# EAGLE board shiva.old (EAGLE 7.7.0)
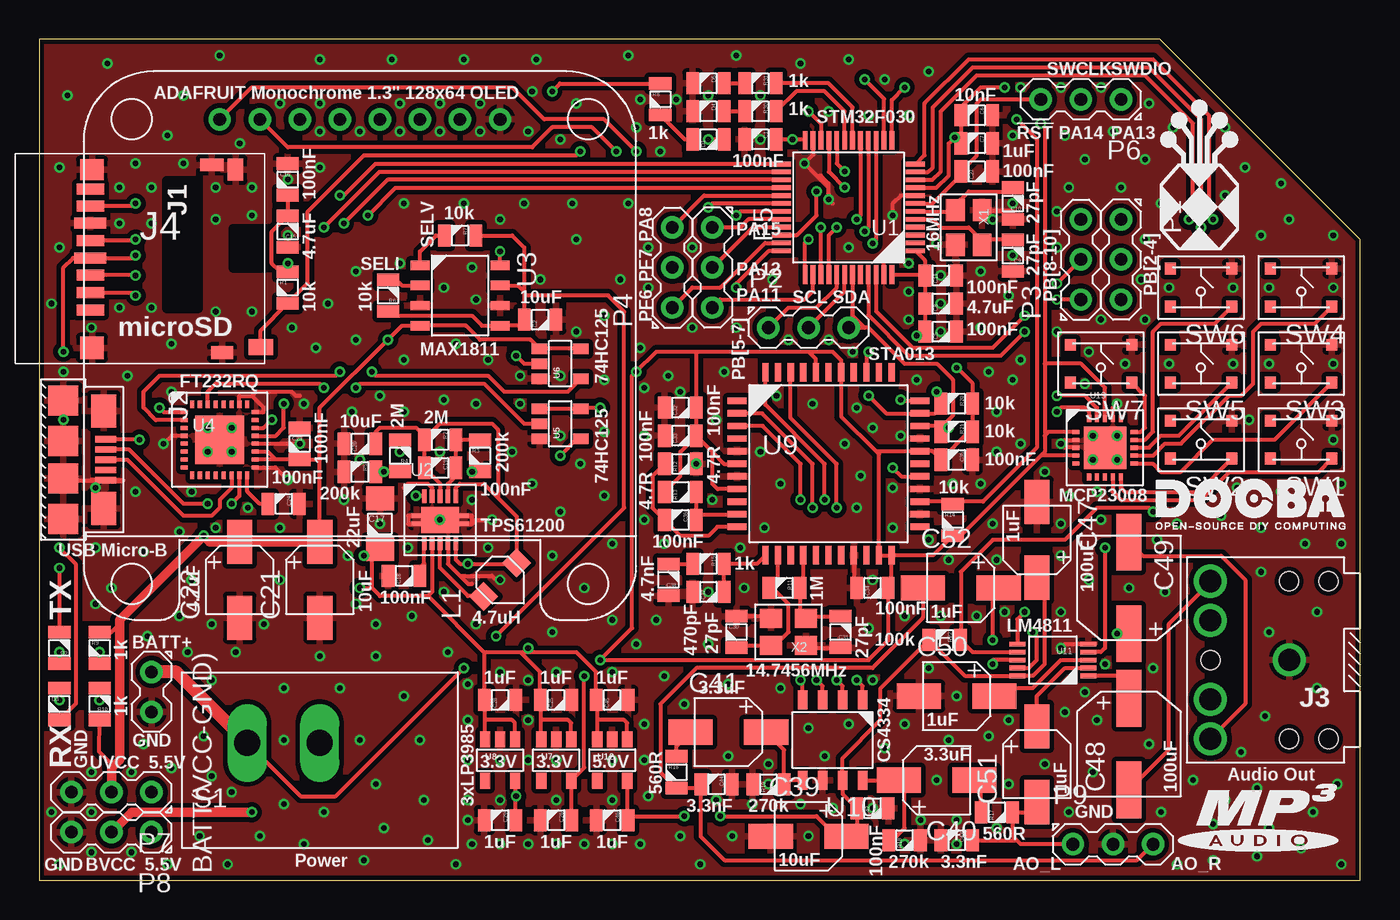
[diagram p0: board, top side]
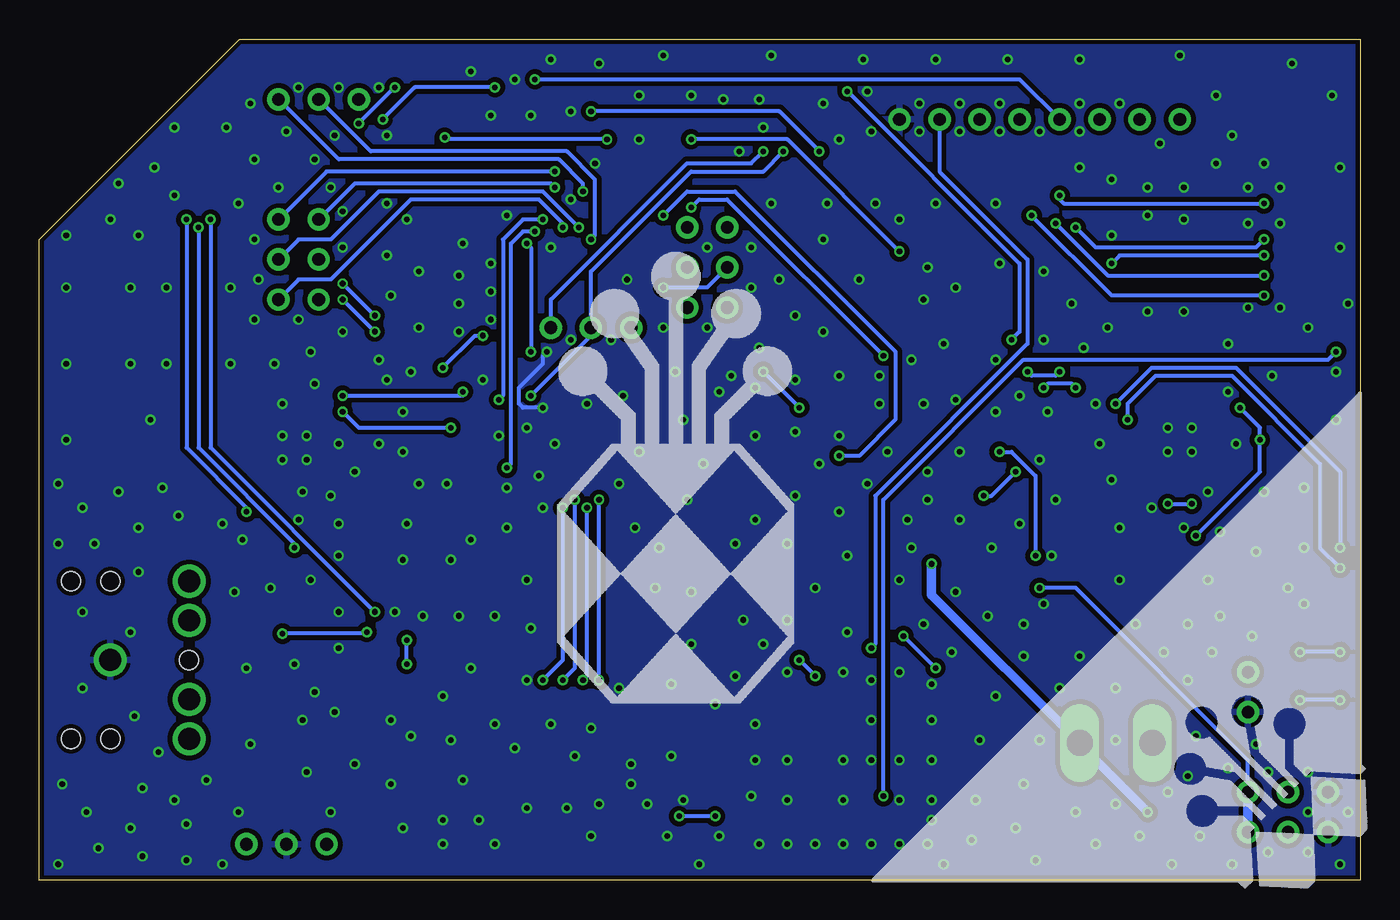
[diagram p1: board, bottom side, seen from below]

Size 83.74 x 53.33 mm. Coordinates in mm from the lower left corner, seen from the top.
Outline: 0,0 83.74,0 83.74,40.63 71.05,53.33 0,53.33 0,0
Copper layers (1*16): Top 0.035mm / dielectric 1.5mm / Bottom 0.035mm
Design rules "dooba *": minimum track width 6mil, minimum drill 12mil, track to track 6mil, track to pad 6mil, pad to pad 6mil, via to via 6mil, smd to smd 0mil, copper to edge 10mil, drill to drill 10mil, minimum pad ring 10mil, minimum via ring 6mil, stop-mask expansion 2mil, vias tented up to drill 25mil, thermal gap 10mil

## Footprints (pad centres in the part's own frame; a part is rotated, then mirrored left to right if it is on the bottom)
PIN_2 = drill 0.8 pad 1.422: 1 -1.27,0; 2 1.27,0
0805 = smd 0.8 x 1.4: 1 -1,0; 2 1,0
1206 = smd 1.524 x 1.778: 1 -1.6,0; 2 1.6,0
RADCAP_SMD_43 = smd 2.8 x 1.6: 1 -2.4,0; 2 2.4,0
RADCAP_SMD_66 = smd 3.6 x 1.6: 1 -2.9,0; 2 2.9,0
DM3D-SF = smd 0.7 x 1.75: CLK/SCK -1.2,-1.34; CMD/DI 1,-1.34; DAT0/DO -3.4,-1.34; DAT1 -4.45,-1.34; DAT2 3.2,-1.34; DAT3/CS 2.1,-1.34 | smd 0.8 x 1.5: GND1 -6,6.36 | smd 0.8 x 1.4: GND2 5.9,7.01 | smd 1.4 x 1.5: GND3 5.6,-1.24 | smd 1.3 x 1.5: GND4 -5.7,-1.24 | smd 1 x 1.55: SW_A 5.55,9.46 | smd 1.4 x 1: SW_B -5.7,7.86 | smd 0.7 x 2.032: VDD -0.1,-1.34; VSS -2.3,-1.34
AMPHENOL-USB-MICRO-B = smd 0.4 x 1.35: 1 -1.3,2.675; 2 -0.65,2.675; 3 0,2.675; 4 0.65,2.675; 5 1.3,2.675 | smd 1.9 x 1.9: P$6 -1.2,0; P$7 1.2,0; P$8 -3.75,0; P$9 3.75,0 | smd 2.1 x 1.6: P$10 -3.1,2.55; P$11 3.1,2.55
SJ1-352XN = drill 1.4 pad 2: 1 0,0; 2 5,-5; 3 5,5; 4 5,-2.5; 5 5,2.5 | hole 1.2: 5,0; 0,-5; 0,5; -2.5,5; -2.5,-5
ADAFRUIT_OLED_13 = drill 0.8 pad 1.422: 3V3 3.81,0; CLK -6.35,0; CS 1.27,0; DATA -8.89,0; DC -3.81,0; GND 8.89,0; RST -1.27,0; VIN 6.35,0
IND-SMD-3232 = smd 1.3 x 1.3 rotated 315: 1 -1.061,1.061; 2 1.061,-1.061
PIN_3 = drill 0.8 pad 1.422: 1 -2.54,0; 2 0,0; 3 2.54,0
GF-1123-0025 = drill 1.65 long: 1 -4.6,1.09; 2 0,1.09
TACTSW_CK_PTS_830 = smd 0.7 x 0.75: 1 -1.95,1.2; 2 1.95,1.2; 3 -1.95,-1.2; 4 1.95,-1.2
QFP48 = smd 1.2 x 0.3: 1 -4.25,2.75; 2 -4.25,2.25; 3 -4.25,1.75; 4 -4.25,1.25; 5 -4.25,0.75; 6 -4.25,0.25; 7 -4.25,-0.25; 8 -4.25,-0.75; 9 -4.25,-1.25; 10 -4.25,-1.75; 11 -4.25,-2.25; 12 -4.25,-2.75; 25 4.25,-2.75; 26 4.25,-2.25; 27 4.25,-1.75; 28 4.25,-1.25; 29 4.25,-0.75; 30 4.25,-0.25; 31 4.25,0.25; 32 4.25,0.75; 33 4.25,1.25; 34 4.25,1.75; 35 4.25,2.25; 36 4.25,2.75 | smd 0.3 x 1.2: 13 -2.75,-4.25; 14 -2.25,-4.25; 15 -1.75,-4.25; 16 -1.25,-4.25; 17 -0.75,-4.25; 18 -0.25,-4.25; 19 0.25,-4.25; 20 0.75,-4.25; 21 1.25,-4.25; 22 1.75,-4.25; 23 2.25,-4.25; 24 2.75,-4.25; 37 2.75,4.25; 38 2.25,4.25; 39 1.75,4.25; 40 1.25,4.25; 41 0.75,4.25; 42 0.25,4.25; 43 -0.25,4.25; 44 -0.75,4.25; 45 -1.25,4.25; 46 -1.75,4.25; 47 -2.25,4.25; 48 -2.75,4.25
S-PVSON-N10 = smd 0.3 x 0.85: 1 -1,-1.5; 2 -0.5,-1.5; 3 0,-1.5; 4 0.5,-1.5; 5 1,-1.5; 6 1,1.5; 7 0.5,1.5; 8 0,1.5; 9 -0.5,1.5; 10 -1,1.5 | smd 2.4 x 1.65: PAD 0,0 | smd 0.6 x 0.28: PAD0 -1.499,0.25; PAD1 -1.499,-0.25; PAD2 1.499,0.25; PAD3 1.499,-0.25
SO8 = smd 0.6 x 1.2: P$1 -1.905,-2.54; P$2 -0.635,-2.54; P$3 0.635,-2.54; P$4 1.905,-2.54; P$5 1.905,2.54; P$6 0.635,2.54; P$7 -0.635,2.54; P$8 -1.905,2.54
32-VQFN = smd 0.45 x 0.26: P$1 -2.25,1.75; P$2 -2.25,1.25; P$3 -2.25,0.75; P$4 -2.25,0.25; P$5 -2.25,-0.25; P$6 -2.25,-0.75; P$7 -2.25,-1.25; P$8 -2.25,-1.75; P$17 2.25,-1.75; P$18 2.25,-1.25; P$19 2.25,-0.75; P$20 2.25,-0.25; P$21 2.25,0.25; P$22 2.25,0.75; P$23 2.25,1.25; P$24 2.25,1.75 | smd 0.26 x 0.45: P$9 -1.75,-2.25; P$10 -1.25,-2.25; P$11 -0.75,-2.25; P$12 -0.25,-2.25; P$13 0.25,-2.25; P$14 0.75,-2.25; P$15 1.25,-2.25; P$16 1.75,-2.25; P$25 1.75,2.25; P$26 1.25,2.25; P$27 0.75,2.25; P$28 0.25,2.25; P$29 -0.25,2.25; P$30 -0.75,2.25; P$31 -1.25,2.25; P$32 -1.75,2.25 | smd 3.1 x 3.1: P$33 0,0
SOT23-5 = smd 0.66 x 1: 1 0.95,1.315; 2 0,1.315; 3 -0.95,1.315; 4 -0.95,-1.315; 5 0.95,-1.315
QFP44 = smd 1.2 x 0.4: 1 -5.8,4; 2 -5.8,3.2; 3 -5.8,2.4; 4 -5.8,1.6; 5 -5.8,0.8; 6 -5.8,0; 7 -5.8,-0.8; 8 -5.8,-1.6; 9 -5.8,-2.4; 10 -5.8,-3.2; 11 -5.8,-4; 23 5.8,-4; 24 5.8,-3.2; 25 5.8,-2.4; 26 5.8,-1.6; 27 5.8,-0.8; 28 5.8,0; 29 5.8,0.8; 30 5.8,1.6; 31 5.8,2.4; 32 5.8,3.2; 33 5.8,4 | smd 0.4 x 1.2: 12 -4,-5.8; 13 -3.2,-5.8; 14 -2.4,-5.8; 15 -1.6,-5.8; 16 -0.8,-5.8; 17 0,-5.8; 18 0.8,-5.8; 19 1.6,-5.8; 20 2.4,-5.8; 21 3.2,-5.8; 22 4,-5.8; 34 4,5.8; 35 3.2,5.8; 36 2.4,5.8; 37 1.6,5.8; 38 0.8,5.8; 39 0,5.8; 40 -0.8,5.8; 41 -1.6,5.8; 42 -2.4,5.8; 43 -3.2,5.8; 44 -4,5.8
PDSO-10 = smd 1 x 0.3: 1 -2.25,1; 2 -2.25,0.5; 3 -2.25,0; 4 -2.25,-0.5; 5 -2.25,-1; 6 2.25,-1; 7 2.25,-0.5; 8 2.25,0; 9 2.25,0.5; 10 2.25,1
20-VQFN = smd 0.45 x 0.26: 1 -1.85,1; 2 -1.85,0.5; 3 -1.85,0; 4 -1.85,-0.5; 5 -1.85,-1; 11 1.85,-1; 12 1.85,-0.5; 13 1.85,0; 14 1.85,0.5; 15 1.85,1 | smd 0.26 x 0.45: 6 -1,-1.85; 7 -0.5,-1.85; 8 0,-1.85; 9 0.5,-1.85; 10 1,-1.85; 16 1,1.85; 17 0.5,1.85; 18 0,1.85; 19 -0.5,1.85; 20 -1,1.85 | smd 2.7 x 2.7: PAD 0,0
XTAL_3225 = smd 1.4 x 1.2: 1 -1.1,-0.85; 2 1.1,-0.85; 3 1.1,0.85; 4 -1.1,0.85

## Placement (x,y rotation side)
BATT(VCC-GND)  PIN_2  [PIN_2]  7.11,11.94 270 top
C1  100nF  [0805]  45.72,46.99 180 top
C2  10uF  [0805]  31.75,35.56 0 top
C5  100nF  [0805]  57.15,34.8 0 top
C6  10nF  [0805]  59.44,48.51 180 top
C7  1uF  [0805]  59.44,46.74 180 top
C8  4.7uF  [0805]  57.15,36.58 0 top
C9  27pF  [0805]  61.72,39.62 90 top
C10  27pF  [0805]  61.72,42.93 90 top
C11  100nF  [0805]  57.15,38.35 0 top
C15  4.7uF  [0805]  15.75,41.15 90 top
C16  100nF  [0805]  15.75,44.45 270 top
C17  22uF  [1206]  21.59,22.61 270 top
C18  100nF  [0805]  23.11,19.3 0 top
C19  100nF  [0805]  25.4,26.16 180 top
C20  10uF  [0805]  20.32,27.69 0 top
C21  10uF  [RADCAP_SMD_43]  17.78,19.05 90 top
C22  4.7uF  [RADCAP_SMD_43]  12.7,19.05 90 top
C23  100nF  [0805]  16.51,27.69 270 top
C24  100nF  [0805]  15.49,23.88 180 top
C25  1uF  [0805]  32.77,11.43 0 top
C26  1uF  [0805]  32.77,3.81 180 top
C27  100nF  [0805]  59.44,44.96 0 top
C28  1uF  [0805]  29.21,11.43 0 top
C29  1uF  [0805]  29.21,3.81 180 top
C30  27pF  [0805]  44.2,15.75 270 top
C31  27pF  [0805]  50.8,15.75 90 top
C32  100nF  [0805]  40.64,29.97 0 top
C33  100nF  [0805]  40.64,28.19 0 top
C34  100nF  [0805]  52.83,18.54 0 top
C35  100nF  [0805]  58.17,26.67 180 top
C36  100nF  [0805]  40.64,22.86 180 top
C37  470pF  [0805]  42.42,18.29 0 top
C38  4.7nF  [0805]  39.88,19.05 90 top
C39  10uF  [RADCAP_SMD_43]  48.77,2.79 0 top
C40  3.3uF  [RADCAP_SMD_43]  56.9,6.35 180 top
C41  3.3uF  [RADCAP_SMD_43]  43.69,9.4 0 top
C42  100nF  [0805]  52.83,4.57 0 top
C43  3.3nF  [0805]  58.17,2.54 180 top
C44  3.3nF  [0805]  42.93,6.1 180 top
C45  1uF  [0805]  36.32,11.43 0 top
C46  1uF  [0805]  36.32,3.81 180 top
C47  1uF  [RADCAP_SMD_43]  63.25,21.59 270 top
C48  100uF  [RADCAP_SMD_66]  69.09,8.64 90 top
C49  100uF  [RADCAP_SMD_66]  69.09,18.54 270 top
C50  1uF  [RADCAP_SMD_43]  58.17,11.68 0 top
C51  1uF  [RADCAP_SMD_43]  63.25,7.37 90 top
C52  1uF  [RADCAP_SMD_43]  58.42,18.54 0 top
D1  CHARGE  [0805]  42.42,46.99 0 top
D2  TX  [0805]  1.27,14.73 90 top
D3  RX  [0805]  1.27,11.18 270 top
D4  MicroSD  [0805]  42.42,48.77 180 top
D5  Activity  [0805]  42.42,50.55 180 top
J1  DM3D-SFDM  [DM3D-SF]  4.57,39.37 270 top
J2  USB-BAMPHENOL-MICRO  [AMPHENOL-USB-MICRO-B]  1.52,26.67 270 top
J3  SJ1-3523N  [SJ1-352XN]  79.25,13.97 180 top
J4  ADAFRUIT_OLED_13  [ADAFRUIT_OLED_13]  20.32,48.26 0 top
L1  4.7uH  [IND-SMD-3232]  29.21,19.05 90 top
P1  PB[2-3-4]  [PIN_3]  68.58,39.37 270 top
P2  PB5-PB6/SCL-PB7/SDA  [PIN_3]  48.77,35.05 0 top
P3  PB[8-9-10]  [PIN_3]  66.04,39.37 90 top
P4  PF6-PF7-PA8  [PIN_3]  40.13,38.86 90 top
P5  PA[11-12-15]  [PIN_3]  42.67,38.86 270 top
P6  PA13/SWDIO-PA14/SWCLK-RST  [PIN_3]  66.04,49.53 180 top
P7  5.5V-USBVCC-GND  [PIN_3]  4.57,5.59 180 top
P8  5.5V-BATTVCC-GND  [PIN_3]  4.57,3.05 180 top
P9  AOUT_L-GND-AOUT_R  [PIN_3]  68.07,2.29 0 top
R1  10k  [0805]  15.75,37.59 270 top
R2  2M  [0805]  25.4,27.94 180 top
R3  200k  [0805]  27.94,26.92 270 top
R4  2M  [0805]  22.86,26.92 90 top
R5  200k  [0805]  20.32,25.91 180 top
R6  10k  [0805]  22.1,37.08 90 top
R7  10k  [0805]  26.67,40.89 180 top
R8  1k  [0805]  39.37,49.53 270 top
R9  1k  [0805]  3.81,14.73 270 top
R10  1k  [0805]  3.81,11.18 90 top
R11  1M  [0805]  47.24,18.54 180 top
R12  4.7R  [0805]  40.64,26.42 0 top
R13  4.7R  [0805]  40.64,24.64 0 top
R14  10k  [0805]  57.91,22.86 270 top
R15  1k  [0805]  42.42,20.07 180 top
R16  560R  [0805]  40.39,6.86 270 top
R17  560R  [0805]  60.71,4.32 0 top
R18  270k  [0805]  54.86,2.54 0 top
R19  270k  [0805]  46.23,6.1 0 top
R20  10k  [0805]  58.17,30.23 180 top
R21  10k  [0805]  58.17,28.45 180 top
R22  100k  [0805]  57.4,15.24 180 top
R30  1k  [0805]  45.72,48.77 180 top
R31  1k  [0805]  45.72,50.55 180 top
S1  SWITCH_SPSTGF-1123-0025  [GF-1123-0025]  17.78,7.62 0 top
SW1  VD  [TACTSW_CK_PTS_830]  80.01,27.94 180 top
SW2  D  [TACTSW_CK_PTS_830]  73.66,27.94 180 top
SW3  R  [TACTSW_CK_PTS_830]  80.01,32.77 180 top
SW4  VU  [TACTSW_CK_PTS_830]  80.01,37.59 180 top
SW5  C  [TACTSW_CK_PTS_830]  73.66,32.77 180 top
SW6  U  [TACTSW_CK_PTS_830]  73.66,37.59 180 top
SW7  L  [TACTSW_CK_PTS_830]  67.31,32.77 180 top
U1  STM32F030X-LQFP48LQFP48  [QFP48]  51.31,42.67 180 top
U2  TPS61200S-PVSON-N10  [S-PVSON-N10]  25.4,22.86 0 top
U3  MAX1811SO8  [SO8]  26.67,37.08 270 top
U4  FT232RQFN32  [32-VQFN]  11.43,27.94 0 top
U5  SN74LVC1G125SOT23-5  [SOT23-5]  33.02,28.96 90 top
U6  SN74LVC1G125SOT23-5  [SOT23-5]  33.02,32.77 90 top
U7  3.3V  [SOT23-5]  32.77,7.62 0 top
U8  3.3V  [SOT23-5]  29.21,7.62 0 top
U9  STA013LQFP44  [QFP44]  50.04,26.42 0 top
U10  CS4334  [SO8]  50.29,8.89 180 top
U11  LM4811PDSO-10  [PDSO-10]  64.26,13.97 180 top
U12  5.0V  [SOT23-5]  36.32,7.62 0 top
U13  MCP23008QFN  [20-VQFN]  67.56,27.43 0 top
X1  16MHz  [XTAL_3225]  58.93,41.4 270 top
X2  14.7456MHz  [XTAL_3225]  47.5,15.75 180 top

## Library data of the parts
BATT(VCC-GND) C1 C2 C5-C11 C15-C52 D1-D5 J1-J4 L1 P1-P9 R1-R22 R30 R31 S1 SW1-SW7 U1-U13 X1 X2 = dooba

## Nets
3.3V-CORE: C1.1 C5.1 C6.2 C7.2 C8.1 C11.1 C26.1 C32.2 C33.2 C34.2 C35.2 R13.1 R14.2 R20.1 R21.1 U1.1 U1.9 U1.24 U1.48 U5.1 U5.5 U7.5 U9.6 U9.8 U9.21 U9.22 U9.29 U9.38 U9.40 U13.1 U13.4 U13.18
3.3V-MICROSD: C15.2 C16.2 C29.1 J1.VDD R1.1 U8.5
5.0V-AUDIO: C39.2 C42.1 C46.1 C47.2 R22.2 U10.P$7 U11.10 U12.5
5.5V: C17.2 C25.1 C28.1 C45.1 J4.VIN P7.1 P8.1 R4.2 U2.2 U7.1 U7.3 U8.1 U8.3 U12.1 U12.3
!MICROSD_CS: J1.DAT3/CS U1.28
!STA013_RST: R14.1 U1.13 U9.25
AMP_SHUTDOWN: R22.1 U1.12 U11.7
AMP_VOL_CLK: U1.11 U11.4
AMP_VOL_UPDN: U1.10 U11.6
AOUT_L: C43.1 C51.1 P9.1 R17.2
AOUT_R: C44.2 C52.1 P9.3 R16.2
BATT_PWR: BATT(VCC-GND).1 C2.1 R6.1 R7.1 S1.1 U3.P$5 U3.P$7
BATTVCC: C19.2 C20.2 L1.2 P8.2 R2.2 S1.2 U2.5 U2.6 U2.8
FT232R_RX: U4.P$2 U6.4
FT232R_TX: U4.P$30 U5.2
GND: BATT(VCC-GND).2 C1.2 C2.2 C5.2 C6.1 C7.1 C8.2 C9.1 C10.1 C11.2 C15.1 C16.1 C17.1 C18.1 C20.1 C21.1 C22.1 C23.1 C24.1 C25.2 C26.2 C27.2 C28.2 C29.2 C30.1 C31.1 C32.1 C33.1 C34.1 C35.1 C37.1 C38.1 C39.1 C42.2 C43.2 C44.1 C45.2 C46.2 C47.1 C50.1 D4.2 D5.2 J1.GND1 J1.GND2 J1.GND3 J1.GND4 J1.SW_B J1.VSS J2.5 J2.P$6 J2.P$7 J2.P$8 J2.P$9 J2.P$10 J2.P$11 J3.1 J4.GND P7.3 P8.3 P9.2 R3.2 R5.2 R12.2 R18.2 R19.1 SW1.3 SW2.3 SW3.3 SW4.3 SW5.3 SW6.3 SW7.3 U1.8 U1.23 U1.47 U2.4 U2.9 U2.PAD U2.PAD0 U2.PAD1 U2.PAD2 U2.PAD3 U3.P$3 U3.P$6 U4.P$4 U4.P$17 U4.P$20 U4.P$24 U4.P$26 U4.P$33 U5.3 U6.3 U7.2 U8.2 U9.5 U9.7 U9.19 U9.24 U9.26 U9.30 U10.P$6 U11.5 U12.2 U13.2 U13.3 U13.17 U13.PAD X1.2 X1.4 X2.2 X2.4
I2C_SCL: J4.CLK P2.2 R20.2 U1.42 U9.32 U13.19
I2C_SDA: J4.DATA P2.3 R21.2 U1.43 U9.31 U13.20
MICROSD_DET: J1.SW_A R1.2 U1.22
MICROSD_MISO: J1.DAT0/DO U1.25
MICROSD_MOSI: J1.CMD/DI U1.27
MICROSD_SCK: J1.CLK/SCK U1.26
N$1: C27.1 P6.3 U1.7
N$2: C31.2 R11.1 U9.15 X2.1
N$3: C30.2 R11.2 U9.13 X2.3
N$4: C9.2 U1.5 X1.3
N$5: C10.2 U1.6 X1.1
N$6: C36.1 R13.2 U9.10
N$7: C36.2 R12.1 U9.11
N$8: C48.1 J3.2
N$9: C38.2 R15.2
N$10: C40.2 R18.1 U10.P$8
N$11: C37.2 R15.1 U9.12
N$12: C41.2 R19.2 U10.P$5
N$13: C19.1 R2.1 R3.1 U2.7
N$14: R4.1 R5.1 U2.10
N$15: C18.2 U2.1
N$16: L1.1 U2.3
N$17: D1.2 U3.P$8
N$18: D1.1 R8.2
N$19: R7.2 U3.P$1
N$20: R6.2 U3.P$2
N$21: C24.2 U4.P$16
N$22: D2.2 U4.P$22
N$23: D3.2 U4.P$21
N$24: D2.1 R9.2
N$25: D3.1 R10.2
N$26: J2.2 U4.P$15
N$27: J2.3 U4.P$14
N$28: C41.1 R16.1
N$29: C40.1 R17.1
N$30: C48.2 U11.1
N$31: C49.2 U11.9
N$32: C50.2 U11.3
N$33: SW1.1 U13.9
N$34: C49.1 J3.3
N$35: SW2.1 U13.10
N$36: SW3.1 U13.11
N$37: SW4.1 U13.12
N$38: SW5.1 U13.13
N$39: C51.2 U11.2
N$40: C52.2 U11.8
N$41: SW6.1 U13.14
N$42: SW7.1 U13.15
N$43: D4.1 R30.2
N$44: D5.1 R31.2
N$45: R30.1 U1.19
N$46: R31.1 U1.18
N$47: P3.3 U1.21
N$48: P3.2 U1.46
N$49: P3.1 U1.45
N$50: P2.1 U1.41
N$51: P1.3 U1.40
N$52: P1.2 U1.39
N$53: P1.1 U1.20
N$54: P4.3 U1.29
N$55: P4.1 U1.35
N$56: P4.2 U1.36
N$57: P5.1 U1.32
N$58: P5.2 U1.33
N$59: P5.3 U1.38
N$60: P6.1 U1.34
N$61: P6.2 U1.37
OLED_RST: J4.RST U1.14
STA013_DREQ: U1.16 U9.27
STA013_LRCKT: U9.2 U10.P$3
STA013_OCLK: U9.3 U10.P$4
STA013_SCKR: U1.15 U9.36
STA013_SCKT: U9.44 U10.P$2
STA013_SDI: U1.17 U9.33
STA013_SDO: U9.42 U10.P$1
STM32F0_RX: U1.31 U5.4
STM32F0_TX: U1.30 U6.2
USBVCC: C21.2 C22.2 C23.2 J2.1 P7.2 R8.1 R9.1 R10.1 U3.P$4 U4.P$1 U4.P$18 U4.P$19 U6.1 U6.5

## Tracks (layer width: path | path; a pad name or v marks a point on that pad's centre or on a via)
3.3V-CORE  (via drill 0.36)
  Top 0.254: C26.1 33.72,3.86 U7.5 34.54,7.13 v34.54,12.95 | C1.1 v47.75,46.99 48.49,46.99 U1.24 | U1.9 56.88,43.92 57.66,44.7 57.66,46.72 v58.05,47.11 C7.2 C6.2 58.44,49.04 59.69,50.29 v61.21,50.29 | U5.1 U5.5 34.4,29.97 v35.56,29.97 | 41.66,33.53 41.66,29.99 C32.2 C33.2 | C33.2 42.67,27.16 | 42.67,27.16 43.42,26.42 U9.6 | U9.8 43,24.82 42.67,25.15 42.67,27.16 | R13.1 40.64,25.64 40.64,27.18 41.64,28.18 C33.2 | 48.77,33.53 50.29,33.53 50.84,32.98 U9.38 50.84,29.43 53.05,27.22 | U9.40 49.24,33.06 48.77,33.53 | 53.05,27.22 U9.29 56.62,27.22 C35.2 58.94,28.45 R21.1 R20.1 59.18,30.24 59.18,31.5 v58.17,32.51 | 53.05,27.22 53.24,27.03 U9.21 U9.22 | C34.2 54.04,18.75 U9.22 | U9.22 56.67,20.62 R14.2 58.44,21.86 63.51,26.93 | 56.32,38.52 C11.1 | U1.48 56.08,38.42 C11.1 | C11.1 C8.1 C5.1 55.88,34.8 v55.63,34.54 | v63.5,48.01 63.75,47.75 63.75,32.77 | 63.75,32.77 63.75,28.19 | 63.75,28.19 63.75,27.18 63.51,26.93 | 53.85,18.54 53.85,15.24 52.58,13.97 v35.56,13.97 37.59,16 37.59,32 v37.85,32.26 39.12,33.53 41.66,33.53 | 41.66,33.53 48.77,33.53 | U1.1 56.15,39.33 C11.1 | U13.4 63.51,26.93 | U13.1 63.99,28.43 63.75,28.19 | U13.18 67.56,31.24 66.04,32.77 63.75,32.77
  Bottom 0.254: v47.75,46.99 57.93,46.99 v58.05,47.11 | v35.56,29.97 v37.85,32.26 | v61.21,50.29 v63.5,48.01 | v34.54,12.95 v35.56,13.97 | v58.17,32.51 56.13,34.54 v55.63,34.54
3.3V-MICROSD  (via drill 0.36)
  Top 0.254: C29.1 30.16,3.86 U8.5 30.16,5.4 v30.23,5.33 | v1.52,33.53 1.52,38.86 2.13,39.47 J1.VDD | 3.13,39.37 J1.VDD | J1.VDD 5.94,39.47 v6.1,39.62 | v15.75,39.12 R1.1 15.26,38.59 14.73,39.12 14.73,41.13 C15.2 C16.2
  Bottom 0.254: v30.23,5.33 30.23,24.13 21.34,33.02 2.03,33.02 v1.52,33.53 | v6.1,39.62 15.24,39.62 v15.75,39.12
5.0V-AUDIO  (via drill 0.36)
  Top 0.254: U12.5 37.27,3.86 C46.1 37.58,4.06 v40.89,4.06 | v43.18,4.06 49.28,4.06 50.55,2.79 C39.2 51.83,3.46 C42.1 50.93,5.48 U10.P$7 50.93,7.75 53.34,10.16 53.34,12.18 R22.2 58.67,12.97 U11.10 63.01,12.97 63.75,13.72 63.75,18.29 63.25,18.8 C47.2
  Bottom 0.254: v40.89,4.06 v43.18,4.06
5.5V  (via drill 0.36)
  Top 0.254: U2.2 24.9,18.3 24.64,18.03 | 24.64,18.03 21.59,18.03 21.08,18.54 | 21.08,18.54 21.08,20.5 | 21.08,20.5 C17.2 | v20.32,18.54 21.08,18.54 | 24.64,18.03 28.21,14.46 | 28.21,14.46 C28.1 28.26,11.38 28.26,10.16 | 30.5,14.46 31.75,13.21 31.75,11.45 C25.1 31.82,11.38 31.82,10.16 | 30.5,14.46 28.21,14.46 | 30.99,14.46 34.05,14.46 35.31,13.21 35.31,11.45 C45.1 35.37,11.38 35.37,10.16 | 30.99,14.46 30.5,14.46 | 35.37,10.16 U12.3 | U8.3 28.26,10.16 | U7.3 31.82,10.16 | U8.1 30.16,9.97 29.97,10.16 28.26,10.16 | U7.1 33.72,9.97 33.53,10.16 31.82,10.16 | U12.1 37.27,9.97 37.08,10.16 35.37,10.16 | v30.99,14.73 30.99,14.46 | R4.2 v22.86,27.18 | v20.57,20.57 20.65,20.5 21.08,20.5
  Bottom 0.254: P7.1 7.11,7.62 18.03,18.54 v20.32,18.54 | J4.VIN 26.67,44.96 21.08,39.37 21.08,34.04 30.73,24.38 30.73,14.99 v30.99,14.73 | v22.86,27.18 22.1,27.18 20.57,25.65 v20.57,20.57
  Bottom 0.61: P7.1 P8.1
!MICROSD_CS  (via drill 0.36)
  Top 0.254: J1.DAT3/CS 5.91,37.27 v6.1,37.08 | v20.83,42.16 22.59,43.92 U1.28
  Bottom 0.254: v6.1,37.08 15.75,37.08 v20.83,42.16
!STA013_RST  (via drill 0.36)
  Top 0.254: U1.13 54.06,49.49 v54.86,50.29 | v61.98,48.26 63.25,46.99 63.25,27.43 59.83,24.02 57.91,24.02 | 57.91,24.02 U9.25 | R14.1 57.91,24.02
  Bottom 0.254: v54.86,50.29 59.94,50.29 v61.98,48.26
AMP_SHUTDOWN  (via drill 0.36)
  Top 0.254: U11.7 59.17,14.47 R22.1 58.42,15.26 58.42,19.56 60.45,21.59 65.02,21.59 67.06,23.62 70.36,23.62 v70.61,23.37 | U1.12 55.58,45.42 56.13,45.97 56.13,49.28 58.93,52.07 70.61,52.07 74.17,48.51 74.17,42.16 v74.42,41.91
  Bottom 0.254: v74.42,41.91 74.42,27.43 70.61,23.62 v70.61,23.37
AMP_VOL_CLK  (via drill 0.36)
  Top 0.254: U1.11 56.35,44.92 56.64,45.21 56.64,49.02 59.18,51.56 70.36,51.56 73.66,48.26 v73.66,41.4 | v67.56,21.08 67.56,14.73 67.3,14.47 U11.4
  Bottom 0.254: v73.66,41.4 73.66,27.43 67.56,21.34 v67.56,21.08
AMP_VOL_UPDN  (via drill 0.36)
  Top 0.254: U1.10 56.61,44.42 57.15,44.96 57.15,48.77 59.44,51.05 70.1,51.05 73.15,48.01 73.15,42.16 v72.9,41.91 | v62.48,17.02 62.01,16.55 U11.6
  Bottom 0.254: v72.9,41.91 72.9,27.43 v62.48,17.02
AOUT_L
  Top 0.254: P9.1 62.23,2.29 61.98,2.54 | 61.98,2.54 61.72,2.79 61.72,4.3 | 61.72,4.3 R17.2 | C43.1 61.98,2.54 | 61.72,4.3 62.58,4.3 C51.1
AOUT_R
  Top 0.254: P9.3 69.6,1.27 43.43,1.27 41.93,2.78 C44.2 41.69,5.86 R16.2 40.37,5.86 39.37,6.86 39.37,11.18 41.66,13.46 52.83,13.46 56.02,16.65 C52.1
BATT_PWR  (via drill 0.36)
  Top 0.254: R6.1 22.37,35.81 27.43,35.81 28.07,35.18 U3.P$5 30.37,35.18 C2.1 30.73,35.58 30.73,37.08 | U3.P$7 30.35,37.72 30.73,37.34 | 30.73,37.34 30.73,37.08 | R7.1 29.97,40.89 30.73,40.13 30.73,37.34 | S1.1 16.56,5.33 18.8,5.33 v26.92,13.46 | 30.73,37.08 36.07,37.08 37.08,36.07 37.08,23.62 v28.96,15.49
  Top 0.813: S1.1 8.68,13.21 BATT(VCC-GND).1
  Bottom 0.254: v26.92,13.46 v28.96,15.49
BATTVCC  (via drill 0.36)
  Top 0.254: U2.5 26.4,20.34 26.67,20.07 v27.18,20.07 30.23,20.07 L1.2 30.27,23.07 29.08,24.26 | U2.8 25.4,25.16 C19.2 R2.2 | C20.2 21.32,28.43 21.59,28.7 23.88,28.7 24.4,28.18 R2.2 | U2.6 26.4,24.88 26.67,25.15 28.19,25.15 29.08,24.26 | R2.2 25.42,28.96 28.7,28.96 29.08,28.57 29.08,24.26
  Top 0.61: P8.2 5.84,4.32 v13.46,4.32
  Bottom 0.61: v27.18,20.07 27.18,18.11 S1.2 17.78,8.64 v13.46,4.32
FT232R_RX  (via drill 0.36)
  Top 0.254: U4.P$2 7.39,29.19 6.6,29.97 6.6,30.99 7.62,32 18.8,32 v19.05,32.26 | v21.08,32.26 21.34,32 28.45,32 29.46,30.99 33.51,30.99 U6.4
  Bottom 0.254: v19.05,32.26 19.3,32 20.83,32 v21.08,32.26
FT232R_TX  (via drill 0.36)
  Top 0.254: U4.P$30 10.68,31 11.18,31.5 17.78,31.5 v18.03,31.24 | U5.2 30.73,28.96 28.19,31.5 20.32,31.5 v20.07,31.24
  Bottom 0.254: v18.03,31.24 18.29,31.5 19.81,31.5 v20.07,31.24
GND  (via drill 0.36)
  Top 0.254: U4.P$26 12.68,30.71 13.48,30.71 | U4.P$4 8.38,28.19 v7.87,27.69 | 14.2,26.19 U4.P$17 14.96,26.19 v15.75,25.4 | 14.23,27.69 U4.P$20 v16.51,27.69 | U4.P$24 14.2,29.69 14.2,30 13.48,30.71 | U2.4 25.9,20.07 26.67,19.3 | U2.9 24.9,24.9 24.89,24.89 24.64,25.15 23.37,25.15 23.11,24.89 | U2.PAD3 27.43,22.61 | 27.43,22.61 27.43,23.11 23.37,23.11 23.37,22.61 U2.PAD1 | 26.67,19.3 27.18,18.8 27.43,18.8 | 13.48,30.71 13.76,30.99 16,30.99 16.26,30.73 16.51,30.73 | v10.67,27.18 U4.P$33 | J2.P$7 1.62,25.37 3.27,25.37 | 27.43,22.61 27.68,22.86 v28.7,22.86 | 26.67,19.3 28.7,19.3 28.96,19.05 v29.21,19.05 | U1.23 49.06,46.01 v48.51,45.47 | U1.8 54.62,43.42 54.1,42.9 v54.1,42.16 | U1.47 53.56,39.41 | 59.94,42.42 61.47,42.42 61.72,42.16 C10.1 61.72,42.42 61.64,42.5 X1.4 60.37,41.91 v60.45,41.91 | X2.2 46.25,16.75 C30.1 | X2.4 48.75,14.75 C31.1 | U9.19 51.64,18.74 C34.1 | U13.3 65.02,27.43 | 65.02,27.43 65.02,27.94 65.03,27.93 U13.2 | v66.8,26.67 U13.PAD | 65.02,27.43 v64.77,27.69 | U13.17 68.06,29.96 68.07,29.97 68.33,29.97 v68.33,30.23 | U11.5 65.01,14.97 v64.77,14.73 | v50.04,43.18 50.04,43.94 v48.51,45.47 | v48.51,45.47 49.28,44.7 49.53,44.7 50.04,44.2 v50.04,43.18 | v50.04,43.18 50.29,42.93 | R3.2 27.92,25.91 v27.43,25.91
  Top 0.305: 5.3,25.37 J2.5 3.27,25.37
  Bottom 0.254: v51.82,29.97 53.09,29.97 53.34,30.23 53.34,31.24 51.82,32.77 51.82,33.27 v51.56,33.53
  other vias: 16.76,30.23 9.65,24.64 10.67,28.7 12.19,28.7 12.19,27.18 25.4,22.86 28.45,21.08 23.37,21.08 21.59,22.61 19.3,24.13 19.56,20.57 25.65,18.29 23.62,16.76 20.07,17.53 15.24,22.35 11.18,22.35 13.21,23.62 8.89,22.1 25.4,27.18 20.32,26.67 19.81,29.72 25.65,30.48 27.69,30.23 29.97,27.18 31.24,25.15 27.43,24.13 30.48,30.23 30.48,32 23.11,33.02 26.42,34.04 20.07,34.29 17.53,33.78 5.59,32 6.1,24.64 3.56,21.08 28.45,33.02 41.66,26.42 38.35,28.19 40.64,30.99 38.35,31.24 38.35,22.86 66.8,28.19 68.33,28.19 68.33,26.67 66.29,31.5 15.75,44.45 13.46,42.16 11.18,41.91 13.46,36.07 5.08,41.66 7.11,41.66 5.08,43.94 7.11,43.94 5.08,36.32 7.11,36.32 11.18,36.07 11.18,43.94 13.46,43.94 6.1,45.47 9.14,45.47 12.7,46.74 17.78,45.21 20.07,38.61 22.86,39.12 26.92,42.93 30.73,42.93 33.78,42.93 37.34,42.93 52.83,28.7 54.1,24.89 54.1,22.35 56.39,21.59 57.66,20.32 60.45,22.61 65.28,24.38 60.71,27.18 57.91,25.15 60.71,29.72 55.63,31.75 49.02,30.23 51.05,27.69 51.82,23.62 45.97,22.35 45.72,27.18 46.74,30.73 43.43,32.26 39.88,32 42.93,29.21 42.67,24.13 44.45,21.08 39.62,21.34 42.42,18.29 39.12,16.51 44.7,18.54 42.42,14.99 52.58,16 52.83,19.05 54.86,16.76 57.15,16.76 59.44,16.76 60.71,20.32 56.39,13.46 52.83,12.7 67.56,13.72 64.77,17.02 61.21,17.02 66.55,19.05 69.09,18.54 71.37,18.29 70.61,13.46 66.29,11.94 65.02,10.67 46.23,6.1 48.77,2.79 43.94,2.79 50.29,4.57 49.78,7.87 48.77,9.65 43.69,7.87 46.23,7.37 42.93,5.08 38.61,5.33 40.64,2.79 52.83,4.57 55.88,3.81 53.59,8.38 54.86,9.91 60.2,9.14 61.47,10.16 65.28,4.32 61.47,6.1 54.86,2.29 58.17,2.29 58.17,3.81 56.9,6.35 57.66,8.89 58.17,11.68 55.12,35.56 55.12,37.34 59.69,35.05 59.69,38.61 61.47,37.08 55.12,39.12 51.31,40.13 45.72,46.99 61.72,47.24 56.9,40.39 61.72,39.62 61.72,42.93 55.12,48.51 52.58,48.51 53.59,50.8 56.39,51.31 48.26,51.82 51.31,52.07 65.28,43.94 65.02,47.24 64.77,50.29 67.31,50.29 62.23,50.29 15.75,40.89 29.21,7.62 32.77,7.62 36.32,7.62 36.32,5.08 32.77,5.08 29.21,5.08 29.21,13.21 32.77,13.21 36.32,13.21 50.04,48.77 39.37,46.23 42.42,49.78 45.72,49.78 40.39,49.53 38.1,49.53 37.85,47.75 33.02,46.99 34.04,49.28 31.24,50.04 29.21,41.91 31.75,38.1 34.04,40.64 36.83,38.1 38.61,37.59 38.61,40.13 41.4,40.13 46.48,38.1 54.61,28.19 60.2,32.26 62.23,33.02 61.72,31.75 59.69,25.15 62.23,27.69 64.77,22.61 67.06,24.64 72.14,22.61 75.95,24.89 82.55,25.15 82.55,21.34 81.03,23.62 77.47,22.35 74.93,23.11 77.47,19.56 81.03,17.02 77.98,15.75 81.03,12.19 77.72,10.41 76.2,8.13 73.15,6.35 70.36,8.64 67.06,10.16 66.8,6.86 63.75,7.37 71.12,4.32 72.14,1.02 82.55,1.02 82.3,6.1 80.77,4.32 77.22,5.84 74.42,3.56 77.22,1.52 77.98,3.3 80.01,2.03 75.18,5.08 74.42,1.27 27.43,2.29 29.21,2.29 30.99,2.29 32.77,2.29 34.54,2.29 36.32,2.29 38.1,2.29 27.18,3.81 27.18,5.08 27.18,7.62 30.99,7.62 38.35,7.62 38.35,9.91 30.99,10.16 30.99,12.7 27.18,10.16 27.18,12.45 20.32,8.89 23.11,11.68 25.91,14.48 21.34,6.1 24.13,8.89 19.05,12.19 15.49,8.89 15.49,12.19 21.34,14.22 21.34,16.26 14.22,16.26 10.92,16.26 12.45,14.48 9.4,14.48 10.92,12.7 10.41,9.14 10.92,6.6 12.19,5.59 8.38,7.11 6.6,8.64 5.84,6.86 3.3,4.32 3.3,1.78 5.84,1.78 3.3,6.86 10.16,2.79 15.49,4.83 18.03,4.32 24.38,5.08 21.84,3.3 13.97,2.79 11.94,1.02 16.76,2.29 20.57,1.27 24.64,2.54 1.27,40.13 1.27,45.21 1.78,49.78 4.32,51.82 9.14,49.78 8.13,47.24 11.43,52.32 17.78,52.07 17.78,49.28 15.24,49.28 22.86,49.28 25.4,49.28 27.94,49.28 22.86,47.5 25.4,47.5 27.94,47.5 20.32,47.5 17.78,47.5 22.35,52.07 26.92,52.07 31.5,52.07 37.34,52.32 30.99,47.5 44.2,52.32 75.18,47.75 71.88,47.75 70.36,49.28 68.07,47.5 66.29,45.72 68.58,43.94 71.12,42.93 70.1,45.72 75.18,43.43 78.74,44.2 82.04,40.89 77.47,40.89 79.25,41.91 76.45,45.21 69.85,38.1 70.1,40.64 67.31,35.56 64.52,40.13 68.83,32.77 70.1,35.56 64.52,34.8 75.69,37.59 82.04,37.59 82.04,32.77 75.69,32.77 82.04,27.94 76.71,29.21 77.98,32.77 71.63,32.77 71.63,37.59 77.98,37.59 57.15,36.58 57.15,38.35 57.15,34.8 66.55,33.53 44.2,35.05 47.5,34.29 50.04,34.29 41.4,35.05 38.1,33.78 35.81,35.81 34.04,34.8 35.81,31.75 33.02,32 33.02,28.19 35.81,28.45 34.29,26.42 33.02,23.37 35.81,24.38 32.51,20.57 27.69,16.26 32.51,15.75 36.32,21.34 36.32,16.51 34.54,18.54 37.85,14.99 39.62,12.95 40.89,11.18 46.99,12.19 43.69,12.45 51.31,9.91 17.78,14.22 15.24,19.05 9.65,19.05 6.86,15.49 3.56,17.53 6.6,20.83 3.56,24.89 1.52,29.21 3.3,35.05 1.52,32.26 0.76,36.58 23.11,42.93 16,35.05 18.29,36.58 8.38,34.04 8.38,30.99 0.76,4.32 8.13,1.02 1.27,1.02 26.42,1.02 41.91,1.02 45.21,4.83 48.26,4.83 60.71,3.3 63.75,25.91 64.77,20.57 67.31,22.86 70.87,21.59 78.74,24.64 80.26,21.34 25.65,37.59 27.43,38.86 27.69,36.83 23.11,29.72 21.59,30.73 8.89,16.76 4.57,18.54 52.07,25.65 46.99,25.15 64.52,42.42
  pour Top (isolate 0.305): 0,0 83.82,0 83.82,53.34 0,53.34
  pour Bottom (isolate 0.305): 0,0 83.82,0 83.82,53.34 0,53.34
I2C_SCL  (via drill 0.36)
  Top 0.254: P2.2 51.06,37.34 U1.42 | v36.58,46.23 35.05,47.75 32.51,47.75 31.24,46.48 15.75,46.48 J4.CLK | v52.58,30.73 53.7,29.62 U9.32 56.79,29.62 56.9,29.72 57.15,29.72 57.15,30.21 R20.2 56.9,30.5 v56.9,30.99 | U13.19 67.06,29.96 66.29,30.73 v64.52,30.73
  Bottom 0.254: v36.58,46.23 37.85,44.96 42.42,44.96 48.77,38.61 P2.2 48.77,34.54 v52.58,30.73 | v64.52,30.73 56.9,30.73 v56.9,30.99
I2C_SDA  (via drill 0.36)
  Top 0.254: U1.43 51.56,35.05 | 51.56,35.05 P2.3 | v37.85,46.23 35.81,48.26 32,48.26 29.97,50.29 13.46,50.29 J4.DATA | 51.56,35.05 | 57.4,28.96 57.91,29.46 57.91,31.75 56.9,32.77 54.86,32.77 52.58,35.05 52.33,35.05 | 57.4,28.96 57.26,28.82 | 57.26,28.82 U9.31 | 51.56,35.05 52.33,35.05 | 52.33,35.05 51.56,35.81 51.56,36.32 | 57.26,28.82 57.17,28.72 R21.2 | U13.20 66.56,29.7 66.29,29.97 64.77,29.97 v64.52,29.72 | v57.66,28.7 57.4,28.96
  Bottom 0.254: P2.3 51.31,36.83 42.67,45.47 38.61,45.47 v37.85,46.23 | v64.52,29.72 63.5,28.7 v57.66,28.7
MICROSD_DET  (via drill 0.36)
  Top 0.254: v34.29,46.23 34.04,45.97 20.57,45.97 17.02,42.42 17.02,37.86 R1.2 14.03,34.88 J1.SW_A | v48.77,48.77 49.56,47.98 U1.22
  Bottom 0.254: v34.29,46.23 36.83,48.77 v48.77,48.77
MICROSD_MISO  (via drill 0.36)
  Top 0.254: U1.25 21.29,45.42 19.3,43.43 v19.05,43.43 | v6.1,42.93 5.94,42.77 J1.DAT0/DO
  Bottom 0.254: v19.05,43.43 19.05,43.18 18.8,42.93 v6.1,42.93
MICROSD_MOSI  (via drill 0.36)
  Top 0.254: U1.27 22.07,44.42 v19.3,41.66 | v6.1,38.35 6.08,38.37 J1.CMD/DI
  Bottom 0.254: v19.3,41.66 16,38.35 v6.1,38.35
MICROSD_SCK  (via drill 0.36)
  Top 0.254: U1.26 21.55,44.92 v18.03,41.4 | v6.1,40.64 6.03,40.57 J1.CLK/SCK
  Bottom 0.254: v18.03,41.4 16.76,40.13 6.6,40.13 v6.1,40.64
N$1
  Top 0.254: U1.7 56.64,42.92 58.44,44.72 C27.1 59.44,45.96 59.44,49.28 59.69,49.53 P6.3
N$2
  Top 0.254: U9.15 48.44,18.23 R11.1 48.24,16.74 48.75,16.75 | X2.1 48.75,16.75 | 48.75,16.75 C31.2
N$3
  Top 0.254: U9.13 46.84,19.14 R11.2 46.48,18.54 47.5,17.53 47.5,15.75 46.74,14.99 46.49,14.99 X2.3 44.35,14.9 C30.2
N$4
  Top 0.254: U1.5 56.63,41.92 57.15,41.4 58.93,41.4 59.44,40.89 59.44,40.64 X1.3 60.1,40.62 C9.2
N$5
  Top 0.254: U1.6 58,42.42 X1.1 58.08,42.84 58.93,43.69 61.48,43.69 C10.2
N$6
  Top 0.254: R13.2 C36.1 42,23.22 U9.10
N$7
  Top 0.254: R12.1 38.86,25.64 38.86,23.62 39.62,22.86 C36.2 40.66,21.84 42.42,21.84 42.99,22.42 U9.11
N$8
  Top 0.254: C48.1 71.63,8.28 71.63,16.26 74.25,18.88 J3.2
N$9
  Top 0.254: C38.2 39.89,20.07 R15.2
N$10
  Top 0.254: R18.1 54.1,2.54 54.86,3.3 54.86,5.98 C40.2 U10.P$8
N$11
  Top 0.254: C37.2 R15.1 45.49,20.07 U9.12
N$12
  Top 0.254: U10.P$5 47.48,6.35 R19.2 47.23,8.26 C41.2
N$13
  Top 0.254: U2.7 25.9,25.14 26.42,25.65 26.42,26.15 C19.1 R2.1 27.92,27.94 R3.1
N$14  (via drill 0.36)
  Top 0.254: U2.10 23.9,24.36 v23.88,24.38 | R4.1 22.84,25.91 v21.84,25.91 R5.1
  Bottom 0.254: v23.88,24.38 23.37,24.38 v21.84,25.91
N$15
  Top 0.254: C18.2 24.13,19.32 24.13,19.81 24.4,20.08 U2.1
N$16
  Top 0.254: L1.1 28.11,18.03 27.18,18.03 25.4,19.81 U2.3
N$17  (via drill 0.36)
  Top 0.254: U3.P$8 v29.21,39.88 | v42.42,46.99 D1.2
  Bottom 0.254: v29.21,39.88 36.32,46.99 v42.42,46.99
N$18
  Top 0.254: R8.2 40.91,46.99 D1.1
N$19
  Top 0.254: U3.P$1 24.13,39.88 25.15,40.89 R7.2
N$20
  Top 0.254: R6.2 22.11,38.1 22.61,38.1 22.99,37.72 U3.P$2
N$21
  Top 0.254: C24.2 13.97,23.88 13.18,24.67 U4.P$16
N$22  (via drill 0.36)
  Top 0.254: U4.P$22 14.21,28.69 v14.73,29.21 | v1.27,19.81 D2.2
  Bottom 0.254: v14.73,29.21 14.73,30.23 12.95,32 8.13,32 2.54,26.42 2.54,21.08 v1.27,19.81
N$23  (via drill 0.36)
  Top 0.254: U4.P$21 14.98,28.19 15.49,28.7 v15.49,30.23 | v1.27,21.08 2.29,20.07 2.29,11.18 1.29,10.18 D3.2
  Bottom 0.254: v15.49,30.23 13.21,32.51 7.87,32.51 1.27,25.91 v1.27,21.08
N$24  (via drill 0.36)
  Top 0.254: D2.1 v1.27,14.48 | v3.81,14.48 R9.2
  Bottom 0.254: v1.27,14.48 v3.81,14.48
N$25  (via drill 0.36)
  Top 0.254: D3.1 v1.27,11.43 | v3.81,11.43 R10.2
  Bottom 0.254: v1.27,11.43 v3.81,11.43
N$26  (via drill 0.36)
  Top 0.254: U4.P$15 12.68,24.36 v12.19,23.88 | v10.67,23.88 9.14,23.88 5.7,27.32 J2.2
  Bottom 0.254: v12.19,23.88 v10.67,23.88
N$27
  Top 0.254: U4.P$14 12.18,24.88 11.43,24.13 11.43,23.62 10.92,23.11 9.14,23.11 5.59,26.67 J2.3
N$28
  Top 0.254: R16.1 40.39,8.5 C41.1
N$29
  Top 0.254: R17.1 59.71,5.94 C40.1
N$30
  Top 0.254: C48.2 69.09,12.95 69.07,12.97 U11.1
N$31  (via drill 0.36)
  Top 0.254: U11.9 62.75,13.47 63.25,13.97 63.25,15.49 v62.99,15.75 | v68.33,15.64 C49.2
  Bottom 0.254: v62.99,15.75 63.1,15.64 v68.33,15.64
N$32
  Top 0.254: C50.2 61.07,12.19 62.99,12.19 64.77,13.97 U11.3
N$33
  Top 0.254: U13.9 68.06,24.65 68.58,24.13 73.66,24.13 75.44,25.91 81.13,25.91 SW1.1
N$34
  Top 0.254: C49.1 69.96,20.57 74.93,20.57 76.45,19.05 76.45,11.18 J3.3
N$35
  Top 0.254: U13.10 68.56,24.91 68.83,24.64 73.51,24.64 SW2.1
N$36
  Top 0.254: U13.11 70.6,26.43 71.12,25.91 72.39,25.91 74.42,27.94 78.33,27.94 SW3.1
N$37
  Top 0.254: U13.12 70.62,26.93 71.37,27.69 72.39,27.69 75.44,30.73 76.2,30.73 76.96,31.5 76.96,34.8 77.47,35.31 80.87,35.31 SW4.1
N$38
  Top 0.254: U13.13 70.36,27.43 71.12,28.19 72.24,28.19 SW5.1
N$39
  Top 0.254: C51.2 63.25,11.68 65.03,13.47 U11.2
N$40  (via drill 0.36)
  Top 0.254: U11.8 60.45,13.97 v60.45,13.72 | v60.45,15.24 60.45,18.29 60.71,18.54 C52.2
  Bottom 0.254: v60.45,13.72 v60.45,15.24
N$41
  Top 0.254: U13.14 70.1,27.93 70.61,28.45 70.61,34.8 71.12,35.31 74.52,35.31 SW6.1
N$42
  Top 0.254: U13.15 69.83,28.43 70.1,28.7 70.1,30.72 SW7.1
N$43
  Top 0.254: D4.1 R30.2
N$44
  Top 0.254: D5.1 R31.2
N$45
  Top 0.254: U1.19 51.06,48.76 49.78,50.04 47.99,50.04 R30.1
N$46
  Top 0.254: U1.18 51.56,49.03 50.04,50.55 R31.1
N$47  (via drill 0.36)
  Top 0.254: U1.21 50.06,44.94 v51.05,43.94
  Bottom 0.254: P3.3 63.75,44.2 51.31,44.2 v51.05,43.94
N$48  (via drill 0.36)
  Top 0.254: U1.46 53.06,36.1 55.37,33.78 60.45,33.78 v62.48,35.81 | P3.2 v64.52,37.85
  Bottom 0.254: v64.52,37.85 v62.48,35.81
N$49  (via drill 0.36)
  Top 0.254: U1.45 52.56,35.83 55.12,33.27 60.96,33.27 v62.48,34.8 | P3.1 v64.52,36.83
  Bottom 0.254: v64.52,36.83 v62.48,34.8
N$50
  Top 0.254: P2.1 47.5,36.32 49.28,36.32 50.56,37.6 U1.41
N$51  (via drill 0.36)
  Top 0.254: U1.40 50.06,40.91 v50.55,41.4
  Bottom 0.254: v50.55,41.4 50.55,41.66 52.07,43.18 60.2,43.18 65.28,38.1 67.31,38.1 P1.3
N$52  (via drill 0.36)
  Top 0.254: U1.39 49.56,41.37 v49.53,41.4
  Bottom 0.254: v49.53,41.4 51.82,43.69 62.23,43.69 65.28,40.64 67.31,40.64 P1.2
N$53  (via drill 0.36)
  Top 0.254: U1.20 50.56,45.45 v51.05,44.96
  Bottom 0.254: v51.05,44.96 65.53,44.96 P1.1
N$54
  Top 0.254: P4.3 42.15,43.42 U1.29
N$55
  Top 0.254: P4.1 41.4,37.59 43.18,37.59 46.01,40.42 U1.35
N$56  (via drill 0.36)
  Top 0.254: v44.2,37.59 44.2,37.85 46.27,39.92 U1.36
  Bottom 0.254: P4.2 41.4,37.59 v44.2,37.59
N$57
  Top 0.254: U1.32 44.97,41.92 44.45,41.4 P5.1
N$58
  Top 0.254: P5.2 45.23,41.42 U1.33
N$59
  Top 0.254: U1.38 49.06,37.37 48.51,36.83 43.18,36.83 P5.3
N$60  (via drill 0.36)
  Top 0.254: U1.34 48.03,40.92 49.28,42.16 v49.28,43.69
  Bottom 0.254: v49.28,43.69 49.28,44.2 50.8,45.72 64.77,45.72 P6.1
N$61  (via drill 0.36)
  Top 0.254: U1.37 48.56,40.43 v48.77,40.64
  Bottom 0.254: v48.77,40.64 48.51,40.89 48.51,44.45 50.29,46.23 62.74,46.23 P6.2
OLED_RST  (via drill 0.36)
  Top 0.254: U1.14 53.56,49.57 v52.32,50.8
  Bottom 0.254: v52.32,50.8 21.59,50.8 J4.RST
STA013_DREQ  (via drill 0.36)
  Top 0.254: U1.16 52.56,41.38 v52.32,41.15 | v54.1,26.16 54.65,25.62 U9.27
  Bottom 0.254: v52.32,41.15 53.09,41.15 53.85,40.39 53.85,26.42 v54.1,26.16
STA013_LRCKT  (via drill 0.36)
  Top 0.254: U10.P$3 49.66,12.32 v49.28,12.7 | v49.02,23.62 49.02,26.42 45.82,29.62 U9.2
  Bottom 0.254: v49.28,12.7 49.02,12.95 v49.02,23.62
STA013_OCLK  (via drill 0.36)
  Top 0.254: U10.P$4 48.39,12.57 v48.26,12.7 | v48.26,24.13 48.26,26.42 45.86,28.82 U9.3
  Bottom 0.254: v48.26,12.7 v48.26,24.13
STA013_SCKR  (via drill 0.36)
  Top 0.254: U1.15 53.06,40.61 v52.83,40.39 | v52.58,33.53 52.44,33.39 U9.36
  Bottom 0.254: v52.83,40.39 52.58,40.13 v52.58,33.53
STA013_SCKT  (via drill 0.36)
  Top 0.254: U10.P$2 50.93,12.32 v50.55,12.7 | v49.78,24.13 49.78,26.42 46.04,30.16 U9.44
  Bottom 0.254: v50.55,12.7 49.78,13.46 v49.78,24.13
STA013_SDI  (via drill 0.36)
  Top 0.254: U1.17 52.06,42.15 v51.82,41.91 | v54.61,30.48 54.67,30.42 U9.33
  Bottom 0.254: v51.82,41.91 53.09,41.91 54.36,40.64 54.36,30.73 v54.61,30.48
STA013_SDO  (via drill 0.36)
  Top 0.254: U10.P$1 52.2,12.32 v51.82,12.7 | v50.55,23.62 50.55,26.42 47.64,29.32 U9.42
  Bottom 0.254: v51.82,12.7 50.55,13.97 v50.55,23.62
STM32F0_RX  (via drill 0.36)
  Top 0.254: U1.31 44.45,42.42 v44.2,42.16 | v33.02,26.92 34.1,28.01 U5.4
  Bottom 0.254: v44.2,42.16 42.67,43.69 39.62,43.69 29.46,33.53 29.46,29.21 31.75,26.92 v33.02,26.92
STM32F0_TX  (via drill 0.36)
  Top 0.254: U1.30 42.67,42.92 v42.42,42.67 | v30.23,33.27 30.73,32.77 U6.2
  Bottom 0.254: v42.42,42.67 41.91,43.18 40.13,43.18 v30.23,33.27
USBVCC  (via drill 0.36)
  Top 0.254: 14.97,26.69 U4.P$18 | C22.2 12.59,21.34 | v6.35,27.94 6.32,27.97 J2.1 | 14.97,26.69 15.74,26.69 C23.2 17.76,26.69 17.78,26.67 | 14.97,26.69 14.47,27.19 U4.P$19 | R8.1 33,50.53 v32.51,50.04 | C21.2 17.78,26.67 | 17.78,26.67 17.78,29.97 v22.1,34.29 22.99,35.18 U3.P$4 27.05,35.18 27.94,34.29 31.13,34.29 U6.1 U6.5 | v7.62,29.97 7.9,29.69 U4.P$1 | 4.57,7.13 4.57,7.37 3.79,8.14 R10.1 | R9.1 4.56,15.73 5.08,16.26
  Top 0.61: P7.2 4.57,7.13 5.08,7.64 5.08,16.26 5.08,16.51 v10.41,21.84 10.81,21.45 C22.2 C21.2
  Bottom 0.254: v10.41,21.84 6.35,25.91 v6.35,27.94 6.35,28.7 v7.62,29.97 | v22.1,34.29 21.59,34.8 21.59,39.12 v32.51,50.04

## Text on the board
tPlace: SWCLK | SWDIO | 1k | ADAFRUIT Monochrome 1.3'' 128x64 OLED | 10nF | 1k | STM32F030 | 1k | !RST | PA14 | PA13 | 100nF | 1uF | 100nF | 27pF | 100nF | 16MHz | 10k | 27pF | SELV | PA8 | PA15 | 4.7uF | SELI | PA12 | PF7 | 100nF | PB[2-4] | 10k | 10k | 10uF | PA11 | SCL | SDA | PB[8-10] | PF6 | PB[5-7] | 4.7uF | 100nF | MAX1811 | STA013 | FT232RQ | 74HC125 | 10k | 10uF | 2M | 2M | 200k | 100nF | 10k | 100nF | 100nF | 100nF | 100nF | 74HC125 | 4.7R | 200k | 100nF | 10k | 4.7R | 1uF | MCP23008 | TPS61200 | USB Micro-B | 22uF | 100nF | 100uF | 1k | 1M | 100nF | 4.7nF | 470pF | 100nF | TX | 4.7uF | 10uF | 4.7uH | 1uF | BATT+ | LM4811 | 27pF | 27pF | 100k | 1k | 14.7456MHz | 1uF | 1uF | 1uF | 3.3uF | 1k | GND | 1uF | 3.3uF | RX | GND | UVCC | 5.5V | 3.3V | 3.3V | 5.0V | CS4334 | Audio Out | 560R | 1uF | 100uF | 3xLP3985 | 3.3nF | 270k | GND | 1uF | 1uF | 1uF | 560R | GND | BVCC | 5.5V | Power | 10uF | 100nF | 270k | 3.3nF | AO_L | AO_R